# EAGLE board MicroIMU (EAGLE 7.4.0)
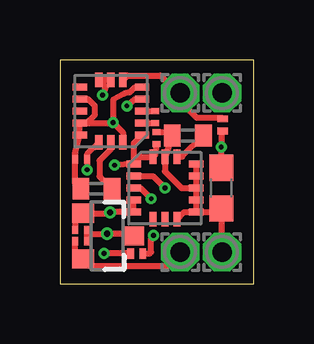
[diagram p0: board, top side]
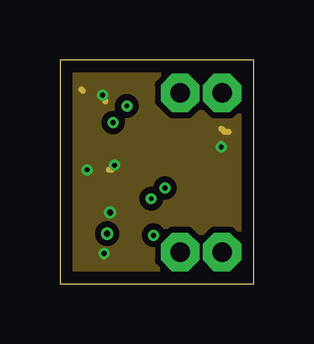
[diagram p1: board, inner layer Route2]
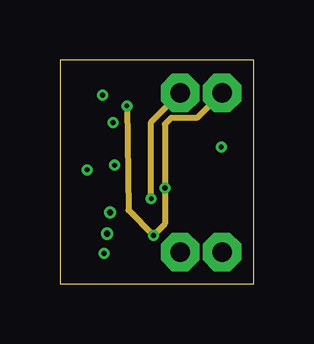
[diagram p2: board, inner layer Route3]
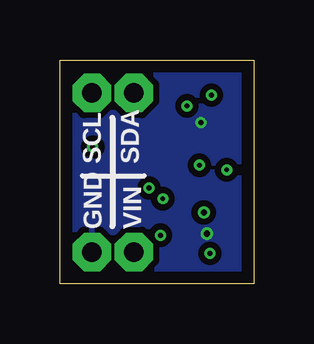
[diagram p3: board, bottom side, seen from below]

Size 8.1 x 9.35 mm. Coordinates in mm from the lower left corner, seen from the top.
Outline: 0,0 8.1,0 8.1,9.35 0,9.35 0,0
Copper layers (1+2*3+16): Top 0.035mm / dielectric 0.091440625mm / Route2 0.035mm / dielectric 5mil / Route3 0.035mm / dielectric 0.091440625mm / Bottom 0.035mm
Design rules "default *": minimum track width 8mil, minimum drill 4mil, track to track 4mil, track to pad 4mil, pad to pad 4mil, via to via 4mil, smd to smd 0mil, copper to edge 20mil, drill to drill 8mil, minimum pad ring 7mil, minimum via ring 5mil, stop-mask expansion 5mil, vias tented up to drill 10mil, thermal gap 10mil

## Footprints (pad centres in the part's own frame; a part is rotated, then mirrored left to right if it is on the bottom)
C0201 = smd 0.25 x 0.35: 1 -0.25,0; 2 0.25,0
C0603 = smd 1.1 x 1: 1 -0.85,0; 2 0.85,0
C0402 = smd 0.7 x 0.9: 1 -0.65,0; 2 0.65,0
1,6/0,8 = drill 0.813 pad 1.6 octagon: 1 0,0
R0201 = smd 0.28 x 0.43: 1 -0.255,0; 2 0.255,0
LGA16L = smd 0.6 x 0.3: P$1 -1.3,1; P$2 -1.3,0.5; P$3 -1.3,0; P$4 -1.3,-0.5; P$5 -1.3,-1; P$9 1.3,-1; P$10 1.3,-0.5; P$11 1.3,0; P$12 1.3,0.5; P$13 1.3,1 | smd 0.3 x 0.6: P$6 -0.5,-1.3; P$7 0,-1.3; P$8 0.5,-1.3; P$14 0.5,1.3; P$15 0,1.3; P$16 -0.5,1.3
SOT23-3 = smd 0.8 x 0.9: 1 -0.95,-1; 2 0.95,-1; 3 0,1.1

## Placement (x,y rotation side)
C1  0.1uF  [C0201]  0.89,1.78 0 top
C2  0.1uF  [C0201]  0.89,2.25 0 top
C3  0.1uF  [C0201]  0.89,5.21 180 top
C4  0.1uF  [C0201]  4.03,6.1 90 top
C5  10uF  [C0603]  6.73,4 270 top
C7  0.01 uF  [C0402]  5.33,6.19 180 top
C8  4.7uF  [C0402]  1.52,3.97 180 top
C9  0.22 uF  [C0201]  3.97,6.95 270 top
GND  GND  [1,6/0,8]  6.76,1.33 0 top
R1  10k  [R0201]  6.79,6.64 270 top
R2  10k  [R0201]  3.21,1.27 180 top
SCL  SCL  [1,6/0,8]  6.76,7.97 0 top
SDA  SDA  [1,6/0,8]  5.02,7.97 0 top
U$1  L3GD20H  [LGA16L]  4.38,4 0 top
U$2  LM3480IM4  [SOT23-3]  1.97,2 270 top
U$3  LSM303D  [LGA16L]  2.13,7.21 180 top
VIN  15V  [1,6/0,8]  5.02,1.33 0 top

## Library data of the parts
C1-C5 C7-C9 R1 R2 = resistor
GND SCL SDA VIN = wirepad
U$1 U$3 = st
U$2 = SparkFun-PowerIC

## Nets
+3V3: C2.1 C3.1 C4.1 C5.1 R1.2 R2.2 U$1.P$1 U$1.P$4 U$1.P$5 U$1.P$16 U$2.1 U$3.P$1 U$3.P$7 U$3.P$8 U$3.P$14
+15V: C1.1 U$2.2 VIN.1
GND: C1.2 C2.2 C3.2 C4.2 C5.2 C7.2 C8.2 GND.1 U$1.P$8 U$1.P$9 U$1.P$10 U$1.P$11 U$1.P$12 U$1.P$13 U$1.P$15 U$2.3 U$3.P$5 U$3.P$10 U$3.P$12 U$3.P$13 U$3.P$16
N$1: C8.1 U$3.P$15
N$2: C9.1 U$3.P$3
N$3: C9.2 U$3.P$2
N$9: C7.1 U$1.P$14
SCL: R2.1 SCL.1 U$1.P$2 U$3.P$4
SDA: R1.1 SDA.1 U$1.P$3 U$3.P$6

## Tracks (layer width: path | path; a pad name or v marks a point on that pad's centre or on a via)
+3V3  (via drill 0.2, 0.25)
  Top 0.254: R2.2 v1.84,1.27 | C2.1 0.64,2.72 arc-90 0.72,2.79 U$2.1 2.06,2.95 v2.1,2.98 2.11,3 U$1.P$5 U$1.P$4 | U$3.P$7 U$3.P$8 1.91,8.23 v1.78,7.87 | U$1.P$1 3.38,5.3 U$1.P$16 3.97,5.39 C4.1 | U$3.P$14 1.14,5.42 C3.1 v1.14,4.76 | U$3.P$1 3.08,5.86 U$1.P$1 | C5.1 v6.73,5.71 6.73,6.32 R1.2 | U$1.P$1 v2.29,4.95
  Route2 0.254: v1.84,1.27 1.84,1.14 | 0.95,8.06 0.89,8.13 | v1.78,7.87 1.91,7.62 | 6.73,6.48 6.86,6.35 7.05,6.35 | 2.16,4.76 2.03,4.76 | v6.73,5.71 6.73,5.84 | v2.29,4.95 2.22,5.02
  pour Route2 (isolate 0.254): 0,8.84 8.1,8.84 8.1,0 0,0
+15V
  Top 0.254: VIN.1 4.51,0.76 1.35,0.76 U$2.2 0.7,1.32 arc-90 0.64,1.38 C1.1
GND  (via drill 0.2, 0.25)
  Top 0.254: 2.81,2.25 U$2.3 | C1.2 C2.2 1.3,2.1 v1.97,2.1 2.97,2.1 U$2.3 | U$3.P$12 U$3.P$13 0.64,5.45 C3.2 0.64,4.17 C8.2 | U$1.P$13 U$1.P$12 U$1.P$11 | U$1.P$11 U$1.P$10 U$1.P$9 | 2.99,2.08 U$2.3 | U$1.P$8 5.18,3 U$1.P$9 | U$3.P$12 2.25,6.71 | 2.25,6.71 2.63,6.33 U$3.P$16 | U$3.P$5 3.13,8.21 2.92,8 2.67,7.94 2.22,7.68 2.22,7 2.25,6.71 | U$3.P$12 1.12,6.71 1.46,7.05 1.46,7.43 1.18,7.71 U$3.P$10 | GND.1 6.73,1.33 C5.2 6.73,3 U$1.P$9 | U$1.P$11 5.08,4 4.38,4.7 U$1.P$15 C7.2 4.47,6.35 C4.2 | 2.25,6.71 v2.22,6.73
  pour Bottom (isolate 0.254): 0,8.84 8.1,8.84 8.1,0 0,0
N$1
  Top 0.254: U$3.P$15 2.13,5.62 1.65,5.14 1.65,4.49 C8.1
N$2
  Top 0.254: U$3.P$3 C9.1
N$3
  Top 0.254: U$3.P$2 C9.2
N$9
  Top 0.254: U$1.P$14 5.1,5.31 C7.1
SCL  (via drill 0.2)
  Top 0.254: R2.1 3.75,1.27 3.81,1.33 3.81,1.91 v3.9,2.03 | U$3.P$4 3.13,7.71 v2.79,7.43 | U$1.P$2 3.88,4.5 v4.38,4
  Route3 0.254: v3.9,2.03 3.87,2.03 | v2.79,7.43 2.86,3.08 v3.9,2.03 | v3.9,2.03 4.38,2.51 v4.38,4 4.38,6.67 4.64,6.92 5.71,6.92 SCL.1
SDA  (via drill 0.2)
  Top 0.254: U$3.P$6 2.82,8.7 4.19,8.7 4.92,7.97 SDA.1 5.02,7.62 5.71,6.92 6.76,6.92 R1.1 | U$1.P$3 3.37,4 v3.81,3.56
  Route3 0.254: v3.81,3.56 3.81,6.76 SDA.1